# EAGLE board Messverstärker + Sensoren (EAGLE 9.6.2)
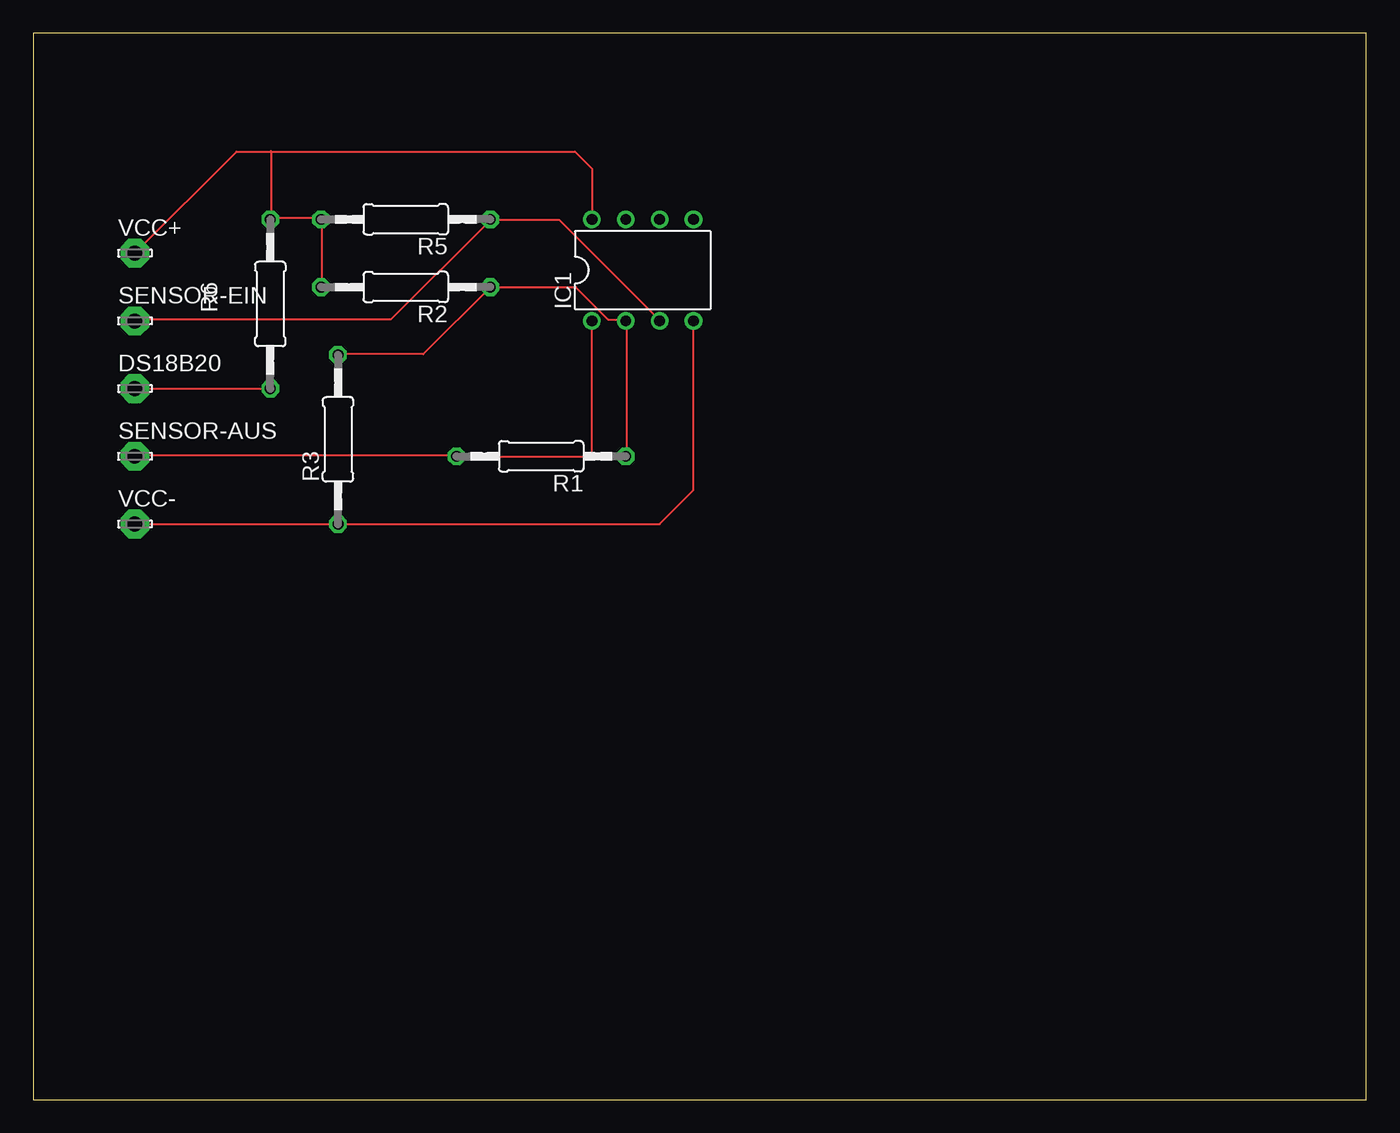
[diagram p0: board, top side]

Size 100 x 80 mm. Coordinates in mm from the lower left corner, seen from the top.
Outline: 0,0 100,0 100,80 0,80 0,0
Copper layers (1*16): Top 0.035mm / dielectric 1.5mm / Bottom 0.035mm
Design rules "default": minimum track width 6mil, minimum drill 0.35mm, track to track 6mil, track to pad 6mil, pad to pad 6mil, via to via 6mil, smd to smd 6mil, copper to edge 40mil, drill to drill 6mil, minimum pad ring 10mil, minimum via ring 8mil, stop-mask expansion 4mil, vias tented up to drill 0mil, thermal gap 10mil

## Footprints (pad centres in the part's own frame; a part is rotated, then mirrored left to right if it is on the bottom)
LSP11 = drill 1.118 pad 2.159 octagon: MP 0,0
DIL08 = drill 0.813 pad 1.27: 1 -3.81,-3.81; 2 -1.27,-3.81; 3 1.27,-3.81; 4 3.81,-3.81; 5 3.81,3.81; 6 1.27,3.81; 7 -1.27,3.81; 8 -3.81,3.81
0207/12 = drill 0.813 octagon: 1 -6.35,0; 2 6.35,0

## Placement (x,y rotation side)
DS18B20  LSP11  [LSP11]  7.62,53.34 0 top
IC1  LM358N  [DIL08]  45.72,62.23 0 top
R1  8,2K  [0207/12]  38.1,48.26 180 top
R2  10K  [0207/12]  27.94,60.96 180 top
R3  1K  [0207/12]  22.86,49.53 90 top
R5  10K  [0207/12]  27.94,66.04 180 top
R6  4,7K  [0207/12]  17.78,59.69 90 top
SENSOR-AUS  LSP11  [LSP11]  7.62,48.26 0 top
SENSOR-EIN  LSP11  [LSP11]  7.62,58.42 0 top
VCC+  V+  [LSP11]  7.62,63.5 0 top
VCC-  LSP11  [LSP11]  7.62,43.18 0 top

## Library data of the parts
DS18B20 SENSOR-AUS SENSOR-EIN VCC+ VCC- = solpad
IC1 = linear
R1-R3 R5 R6 = rcl; SPICEPREFIX: R

## Nets
N$1: IC1.1 R1.2 SENSOR-AUS.MP
N$2: IC1.2 R1.1 R2.1 R3.2
N$7: IC1.3 R5.1 SENSOR-EIN.MP
N$9: DS18B20.MP R6.1
V+: IC1.8 R2.2 R5.2 R6.2 VCC+.MP
V-: IC1.4 R3.1 VCC-.MP

## Tracks (layer width: path | path; a pad name or v marks a point on that pad's centre or on a via)
N$1
  Top 0.152: IC1.1 41.91,48.26 R1.2 31.7,48.31 7.62,48.31 SENSOR-AUS.MP
N$2
  Top 0.152: R1.1 44.5,48.31 44.5,58.37 IC1.2 44.35,58.52 43.13,58.52 40.69,60.96 R2.1 29.26,55.93 22.86,55.93 R3.2
N$7
  Top 0.152: 34.29,65.99 39.47,65.99 46.94,58.52 IC1.3 | 34.29,65.99 26.82,58.52 7.62,58.52 SENSOR-EIN.MP | 34.29,65.99 R5.1
N$9
  Top 0.152: DS18B20.MP R6.1
V+
  Top 0.152: VCC+.MP 15.24,71.12 17.83,71.12 | 17.83,71.12 40.64,71.12 41.91,69.85 IC1.8 | 17.83,66.14 21.49,66.14 R5.2 21.64,65.99 21.64,60.96 R2.2 | 17.83,71.12 17.83,66.14 | 17.83,66.14 R6.2 | 17.83,71.17 17.83,71.12
V-
  Top 0.152: IC1.4 49.53,45.72 46.99,43.18 R3.1 22.86,43.13 7.62,43.13 VCC-.MP